# EAGLE board Girraffe V3 (EAGLE 7.7.0)
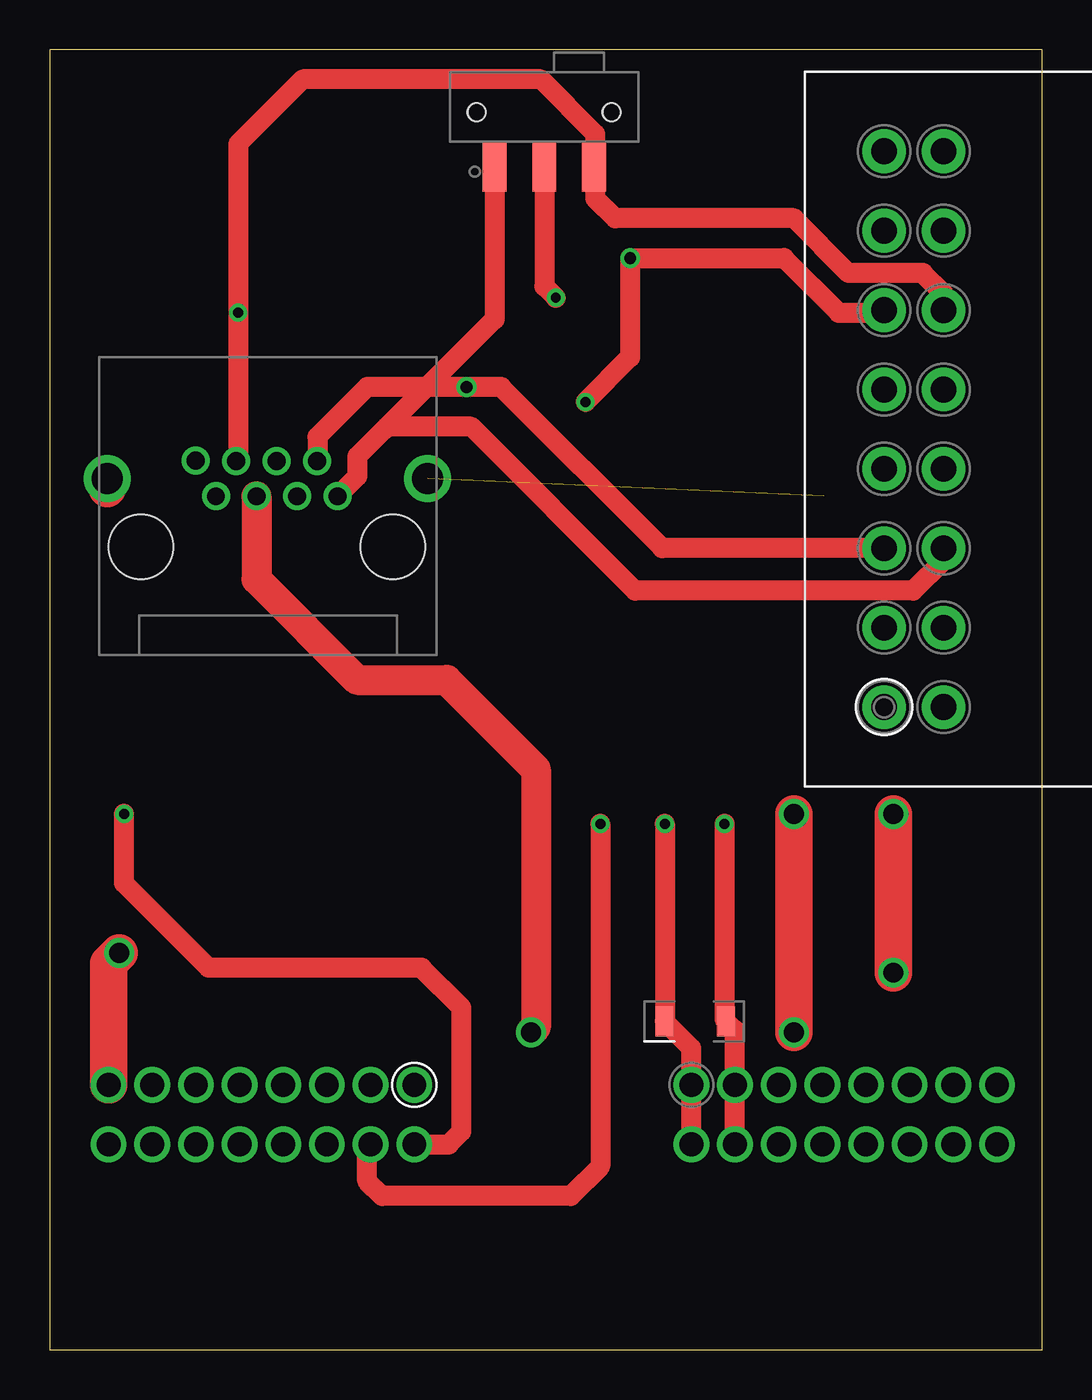
[diagram p0: board, top side]
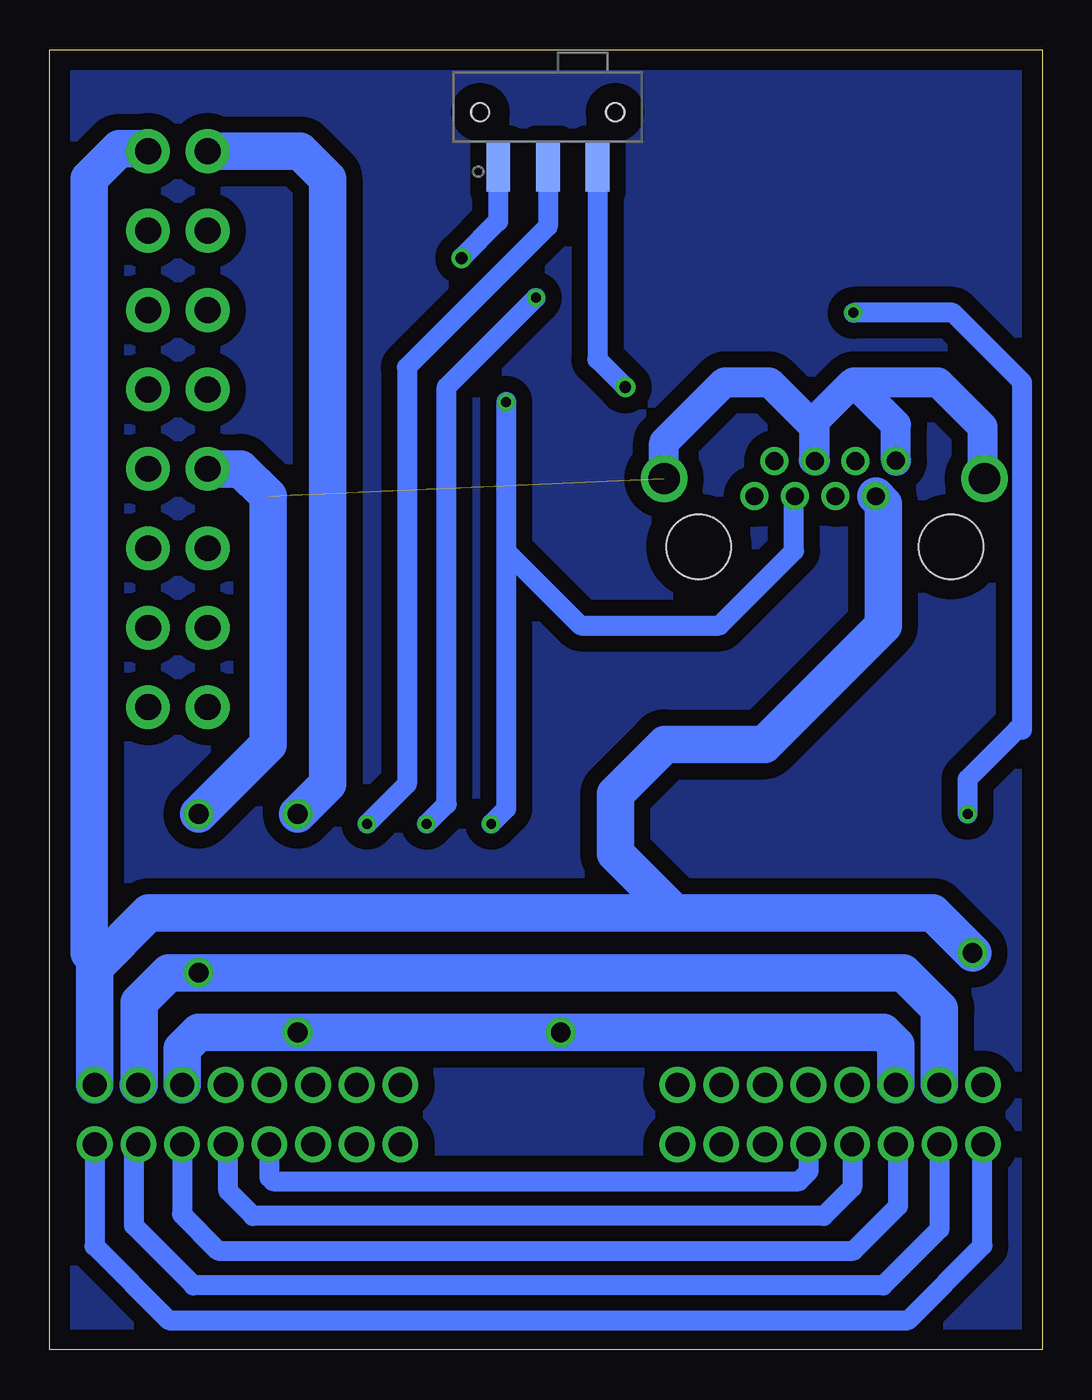
[diagram p1: board, bottom side, seen from below]

Size 50 x 65.5 mm. Coordinates in mm from the lower left corner, seen from the top.
Outline: 0,0 50,0 50,65.5 0,65.5 0,0
Copper layers (1*16): Top 0.035mm / dielectric 1.5mm / Bottom 0.035mm
Design rules "default": minimum track width 10mil, minimum drill 24mil, track to track 8mil, track to pad 8mil, pad to pad 8mil, via to via 8mil, smd to smd 8mil, copper to edge 40mil, drill to drill 8mil, minimum pad ring 10mil, minimum via ring 8mil, stop-mask expansion 4mil, vias tented up to drill 0mil, thermal gap 10mil

## Footprints (pad centres in the part's own frame; a part is rotated, then mirrored left to right if it is on the bottom)
120OHM = smd 0.9 x 1.5: 1 0,0; 2 3.1,0
OBDII = drill 1.3 pad 2.2: 1 0,0; 2 0,-4; 3 0,-8; 4 0,-12; 5 0,-16; 6 0,-20; 7 0,-24; 8 0,-28; 9 -3,0; 10 -3,-4; 11 -3,-8; 12 -3,-12; 13 -3,-16; 14 -3,-20; 15 -3,-24; 16 -3,-28
R137 = drill 1.2: 1 0,0; 2 -2.2,0; 3 -4.4,0; 4 -6.6,0; 5 -8.8,0; 6 -11,0; 7 -13.2,0; 8 -15.4,0; 9 0,-3; 10 -2.2,-3; 11 -4.4,-3; 12 -6.6,-3; 13 -8.8,-3; 14 -11,-3; 15 -13.2,-3; 16 -15.4,-3
R137OUT = drill 1.2: 1 0,0; 2 2.2,0; 3 4.4,0; 4 6.6,0; 5 8.8,0; 6 11,0; 7 13.2,0; 8 15.4,0; 9 0,-3; 10 2.2,-3; 11 4.4,-3; 12 6.6,-3; 13 8.8,-3; 14 11,-3; 15 13.2,-3; 16 15.4,-3
SLIDESWITCH = smd 1.2 x 2.5: 1 -2.5,0; 2 0,0; 3 2.5,0 | hole 0.9: 3.4,2.75; -3.4,2.75
VERRJ45 = drill 0.9: 12V -6.12,0; CAN1H -2.04,0; CAN1L -5.1,1.78; CAN2H -1.02,1.78; CAN2L 0,0; GND@1 -7.14,1.79; GND@5 -3.06,1.78; IGN -4.08,0 | drill 1.57: GND@9 -11.6,0.89; GND@10 4.54,0.89 | hole 3.25: 2.79,-2.54; -9.91,-2.54

## Placement (x,y rotation side)
U$1  120OHM  [120OHM]  30.98,16.55 0 top
U$2  OBDII90DEG  [OBDII]  42.04,32.38 180 top
U$3  R137IN  [R137]  18.37,13.35 0 top
U$4  R137OUT  [R137OUT]  32.33,13.35 0 top
U$5  SLIDESWITCH  [SLIDESWITCH]  24.92,59.6 0 top
U$6  SLIDESWITCH  [SLIDESWITCH]  24.9,59.6 0 bottom
U$7  [VERRJ45]  14.5,43 0 top

## Library data of the parts
U$1-U$7 = Giraffe

## Nets
12V: U$2.16 U$3.8 U$4.8 U$7.12V
ACC: U$2.8 U$3.6 U$4.6 U$7.IGN
GND: U$2.4 U$3.7 U$4.7 U$7.GND@1 U$7.GND@5 U$7.GND@9 U$7.GND@10
N$1: U$1.1 U$4.1 U$4.9
N$2: U$1.2 U$4.2 U$4.10 U$6.2
N$3: U$2.14 U$3.9 U$5.3 U$7.CAN1L
N$4: U$2.11 U$5.1 U$7.CAN2L
N$5: U$2.6 U$3.10 U$6.1 U$7.CAN1H
N$6: U$2.3 U$6.3 U$7.CAN2H
N$7: U$3.16 U$4.16
N$8: U$3.15 U$4.15
N$9: U$3.14 U$4.14
N$10: U$3.13 U$4.13
N$11: U$3.12 U$4.12
S$1: U$5.2

## Tracks (layer width: path | path; a pad name or v marks a point on that pad's centre or on a via)
12V  (via drill 1)
  Top 1.9: U$3.8 2.97,19.47 v3.5,20
  Bottom 1.9: U$4.8 47.73,19.27 | 47.73,19.27 45,22 18.5,22 | 18.5,22 5.5,22 v3.5,20 | 47.73,19.27 47.73,19.73 48,20 48,59 46.5,60.5 45.16,60.5 U$2.16 | U$7.12V 8,42.62 8,36.5 14,30.5 19,30.5 21.5,28 21.5,25 18.5,22
ACC  (via drill 1)
  Top 1.5: U$7.IGN 10.42,38.83 15.5,33.75 20,33.75 24.5,29.25 24.5,16.25 v24.25,16
  Top 1.9: v37.5,27 v37.5,16
  Bottom 1.9: U$4.6 43.33,15.17 42.5,16 v37.5,16 v24.25,16 8,16 7.37,15.37 U$3.6 | U$2.8 37.38,60.38 36,59 36,28.5 v37.5,27
GND  (via drill 1)  (1 unrouted)
  Top 1.9: v42.5,27 v42.5,19 | U$7.GND@9 2.9,43.4
  Bottom 1.5: U$7.GND@10 19.04,45.71 16,48.75 13.75,48.75 11.5,46.5 11.5,44.84 U$7.GND@5 11.44,46.81 9.5,48.75 9,48.75 | 9,48.75 5.25,48.75 3,46.5 3,43.99 U$7.GND@9 | U$7.GND@1 7.36,46.61 9,48.25 9,48.75
  Bottom 1.9: U$3.7 5.17,17.17 7,19 v42.5,19 44,19 45.5,17.5 45.5,13.38 U$4.7 | U$2.4 40.38,44.38 39,43 39,30.5 v42.5,27
N$1  (via drill 0.5)
  Top 1: U$4.9 U$4.1 32.33,15.2 U$1.1 31,16.57 v31,26.5
  Bottom 1: 30,27.5 v31,26.5
N$2  (via drill 0.5)
  Top 1: U$4.10 U$4.2 34.53,16.1 U$1.2 34,16.63 v34,26.5
  Bottom 1: v34,26.5 32,28.5 32,49.5 24.9,56.6 U$6.2
N$3  (via drill 0.5)
  Top 1: U$2.14 45.04,53.21 44,54.25 40.25,54.25 37.5,57 28.5,57 27.5,58 27.5,59.52 | 27.5,59.52 U$5.3 | 27.5,59.52 27.5,61.25 24.75,64 12.75,64 9.5,60.75 v9.5,52.25 9.5,44.88 U$7.CAN1L | U$3.9 20.1,10.35 20.75,11 20.75,17.25 18.75,19.25 8,19.25 3.75,23.5 v3.75,27
  Bottom 1: v3.75,27 3.75,28.75 1.25,31.25 1,31.25 1,48.75 4.5,52.25 v9.5,52.25
N$4
  Top 1: 45.04,40.96 U$2.11 45.04,39.79 43.5,38.25 29.5,38.25 21.25,46.5 17,46.5 | 17,46.5 16.88,46.38 15.5,45 15.5,44 U$7.CAN2L | U$5.1 22.42,51.92 17,46.5
N$5  (via drill 0.5, 0.6)
  Top 1: U$2.6 41.91,52.25 39.75,52.25 37,55 v29.25,55 29.25,50 v27,47.75 | v27.75,26.5 27.75,9.25 26.25,7.75 16.75,7.75 16,8.5 16,10.18 U$3.10
  Bottom 1: U$6.1 27.4,56.85 v29.25,55 | v27,47.75 27,40.25 | 27,40.25 23.25,36.5 16.25,36.5 12.5,40.25 12.5,42.96 U$7.CAN1H | 27,40.25 27,27.25 v27.75,26.5
N$6  (via drill 0.6)
  Top 1: U$2.3 30.87,40.38 22.75,48.5 v21,48.5 16,48.5 13.5,46 13.5,44.8 U$7.CAN2H
  Bottom 1: U$6.3 22.4,49.9 v21,48.5
N$7
  Bottom 1: U$4.16 47.73,5.23 44,1.5 6.75,1.5 3,5.25 3,10.32 U$3.16
N$8
  Bottom 1: U$3.15 5.17,6.08 8,3.25 42.75,3.25 45.75,6.25 45.75,10.13 U$4.15
N$9
  Bottom 1: U$4.14 43.33,6.83 41.5,5 9.5,5 7.25,7.25 7.25,10.23 U$3.14
N$10
  Bottom 1: U$3.13 9.57,8.18 11,6.75 39.75,6.75 41,8 41,10.22 U$4.13
N$11
  Bottom 1: U$4.12 38.93,8.68 38.75,8.5 12.25,8.5 11.75,9 11.75,10.33 U$3.12
S$1  (via drill 0.5)
  Top 1: U$5.2 24.92,53.58 v25.5,53
  Bottom 1: 31,26.5 30,27.5 30,48.5 v25.5,53
S$2
  pour Bottom (isolate 0.813): 0.5,65 49.5,65 49.5,0.5 0.5,0.5